# Altium PCB projet_pcb_bluepill_f103.PCBDOC
Units mil, origin at the board's own origin, x right, y up, seen from the top; angles counter-clockwise.
Board outline 3545 x 2760 mil, 2 copper layers (TopLayer, BottomLayer); 18 components, 39 nets, 100 pads, 7 vias.
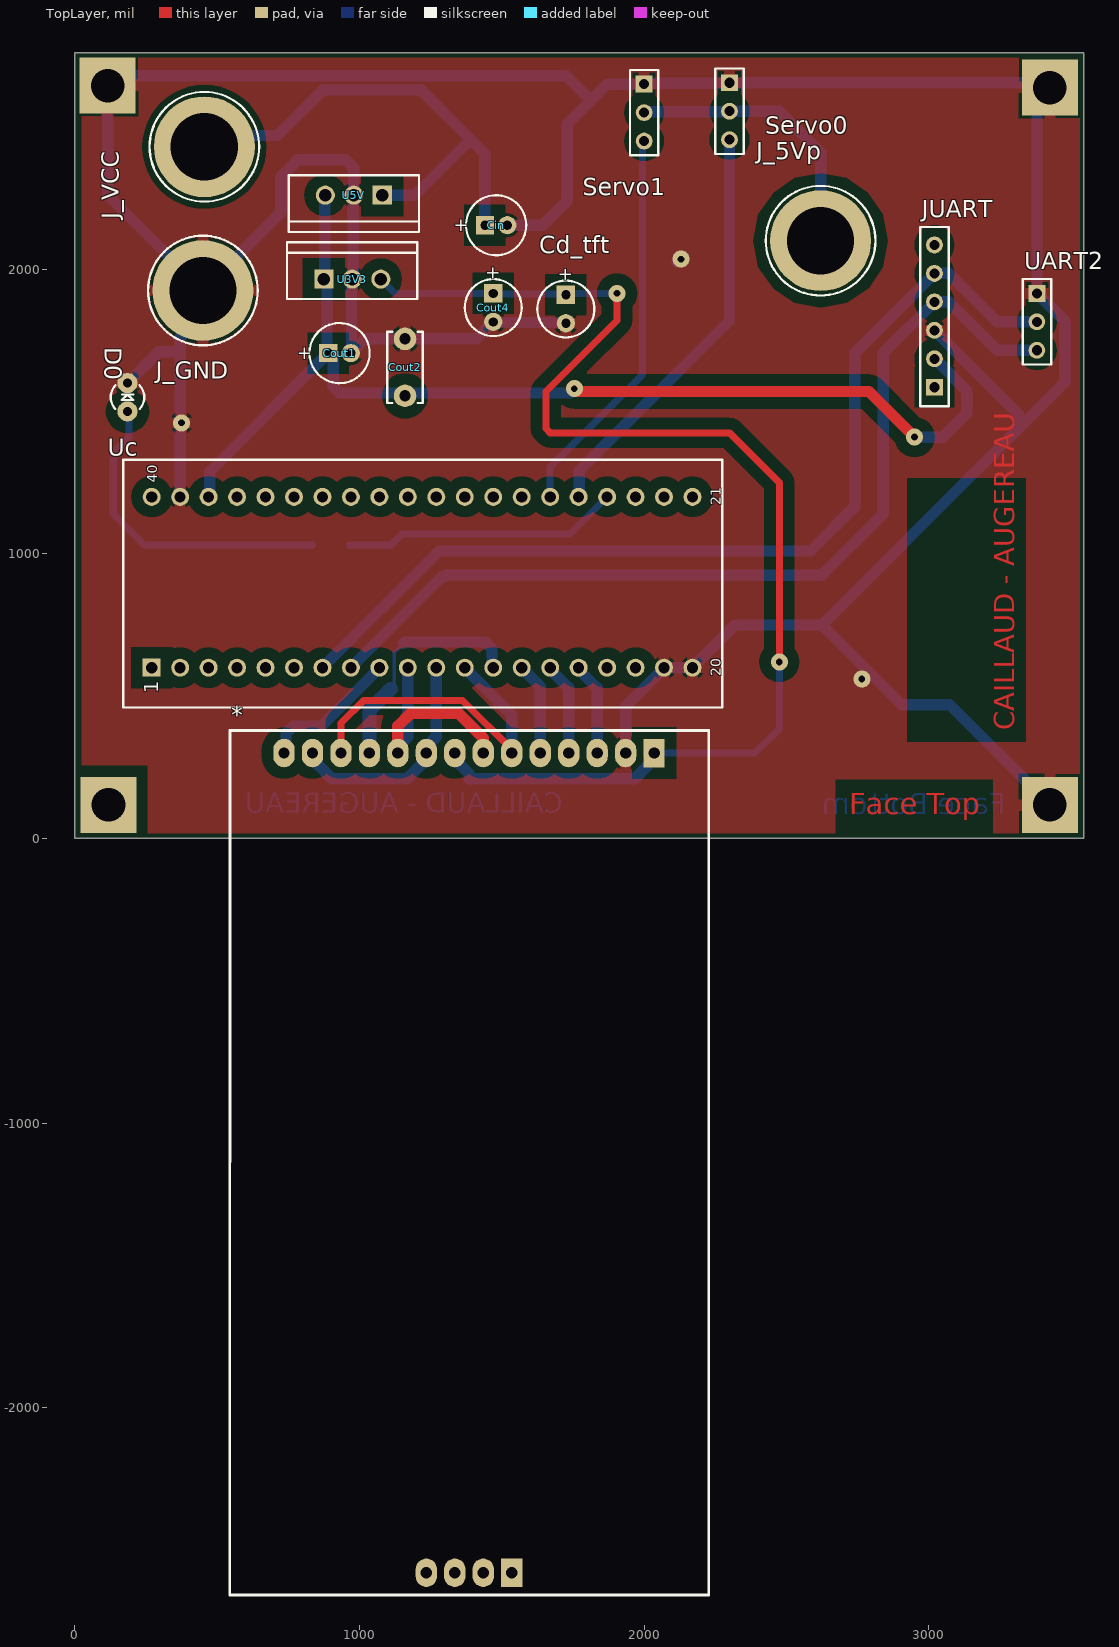
[diagram p0: TopLayer view]
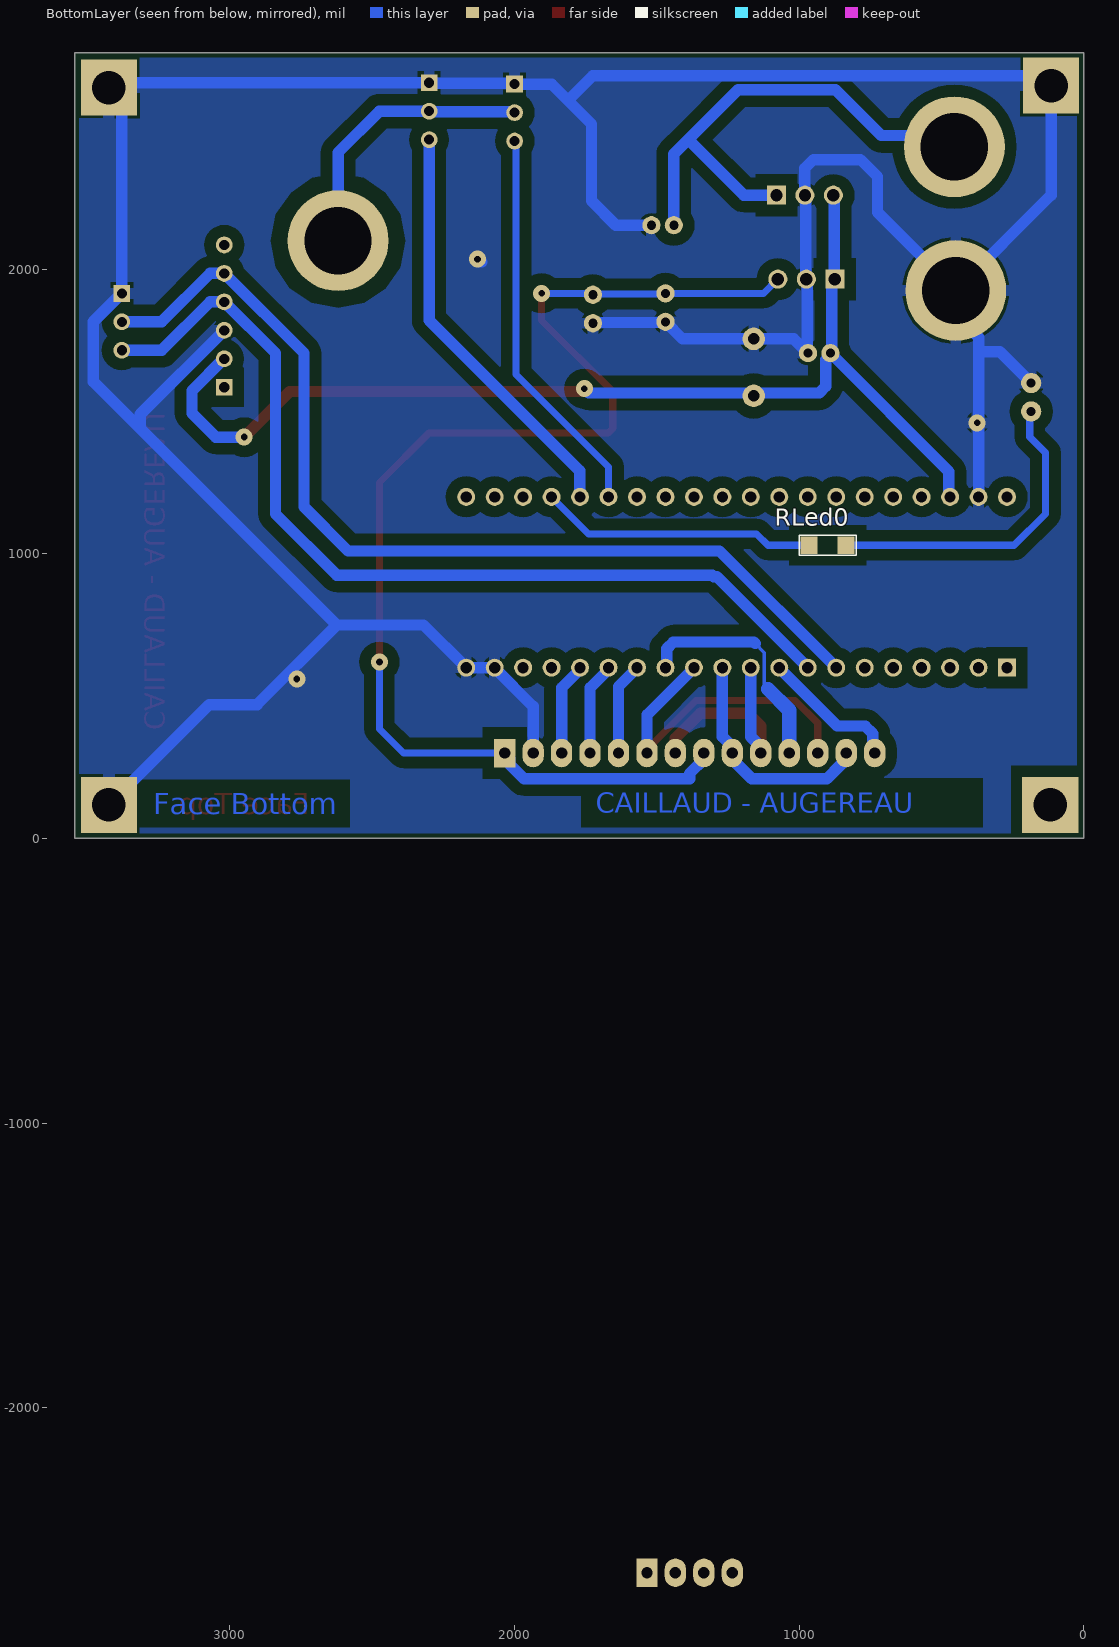
[diagram p1: BottomLayer view, seen from below]

## Layer stack, top to bottom
TopSolder: solder mask 0.4, Solder Resist, Dk 3.5
TopLayer: signal copper 1.4
Dielectric1: core 12.6, FR-4, Dk 4.8
BottomLayer: signal copper 1.4
BottomSolder: solder mask 0.4, Solder Resist, Dk 3.5

## Board outline
0,0 0,2760 3545,2760 3545,0

## Design rules (kind name [scope] priority, off if disabled: settings)
Clearance PowerPlaneClearance [InNamedPolygon('Bot-GND') Or  InNamedPolygon('Top-GND')] p1: gap=40 ignorepadtopadclearanceinfootprint=FALSE except(0: Arc-Hole Track-Hole SMDPad-Hole THPad-Hole Via-Hole Fill-Hole Poly-Hole Region-Hole Text-Hole)
Clearance [All] p2: gap=10 ignorepadtopadclearanceinfootprint=TRUE
FabricationTestPointUsage TestPointUsage [All] p1: valid=0 allowmultiple=FALSE
FabricationTestpoint Testpoint [All] p1: side=3 testpointundercomponent=TRUE minsize=40 maxsize=100 preferedsize=60 minholesize=20 maxholesize=40 preferedholesize=32 testpointgrid=1 allowsidetop=TRUE allowsidebottom=TRUE usegrid=TRUE gridtolerance=0.01
Height [All] p1: minheight=0 maxheight=2000 prefheight=500
HoleSize [All] p1: absolutevalues=TRUE maxlimit=300 minlimit=11.81 maxpercent=80.000 minpercent=20.000
PlaneClearance [All] p1: clearance=40
PlaneConnect [All] p1: planeconnectstyle=Relief reliefexpansion=19.68 reliefentries=4 reliefconductorwidth=40 reliefairgap=19.68
PolygonConnect [All] p1: connectstyle=Relief reliefconductorwidth=40 reliefentries=4 polygonreliefangle="90 Angle" airgapwidth=10
RoutingVias [All] p1: holewidth=23.62 width=60 viastyle="Through Hole" minholewidth=23.62 minwidth=60 maxholewidth=23.62 maxwidth=60
SilkToSolderMaskClearance SilkscreenOverComponentPads [IsPad] p1: minsilkscreentomaskgap=10 clearancetoexposedcopper=TRUE
SolderMaskExpansion [All] p1: expansion=2
Width [All] p1: maxlimit=1000 minlimit=12 preferedwidth=40 minimp=50.000000 maximp=50.000000 favimp=50.000000
23 further rules are at their usual default settings.

## Components (designator, comment, footprint, x,y, rotation, side; value= is the part's Value field where it differs from the comment)
* "2.4_TFT_TOUCH" 2.4_TFT_TOUCH 545,380 r270 top
Cd_tft "10uF" CONDENSATEUR_POLARISE_ELECTROLYTIQUE_RADIAL_2.54/5.08 1725,1910 r270 top
Cin "CONDENSATEUR_POL_ELECTROLY_RAD_2.0/5.08" CONDENSATEUR_POLARISE_ELECTROLYTIQUE_RADIAL_2.0/5.08 1480,2154.42 r0 top value=10µF/>25V
Cout1 "CONDENSATEUR_POL_ELECTROLY_RAD_2.0/5.08" CONDENSATEUR_POLARISE_ELECTROLYTIQUE_RADIAL_2.0/5.08 930,1705 r0 top value=1µF/>10V
Cout2 "CONDENSATEUR_CER_RAD_5.08" CONDENSATEUR_CERAMIQUE_RADIAL_5.08 1160,1755 r270 top value=100nF
Cout4 "CONDENSATEUR_POL_ELECTROLY_RAD_2.54/5.08" CONDENSATEUR_POLARISE_ELECTROLYTIQUE_RADIAL_2.54/5.08 1470,1915 r270 top value=4.7µF/63V
D0 "LED_3MM" LED_3MM 185,1550 r0 top
J_5Vp "DOUILLE BANANE 4mm" DOUILLE_BANANE_4mm#1 2620,2100 r0 top
J_GND "DOUILLE BANANE 4mm" DOUILLE_BANANE_4mm#2 450,1925 r0 top
J_VCC "DOUILLE BANANE 4mm" DOUILLE_BANANE_4mm#2 455,2430 r0 top
JUART "BARRETTE_6 CONTACTS_1 RANGEE_FEMELLE_DROITE" BARRETTE_6_F_D 3020,1585 r90 top
RLed0 "RESISTANCE_CMS_1206" RESISTANCE_CMS_1206 835,1030 r0 bottom value=150
Servo0 "BARRETTE 3 CONTACTS 1 RANGEE MALE DROITE" BARRETTE_3_M_D 2300,2655 r270 top
Servo1 "BARRETTE 3 CONTACTS 1 RANGEE MALE DROITE" BARRETTE_3_M_D 2000,2650 r270 top
U3V3 "REGULATEUR_TO220_78XX" REGULATEUR_TO220_78XX 975,1965 r0 top
U5V "REGULATEUR_TO220_78XX" REGULATEUR_TO220_78XX 980,2260 r180 top
UART2 "BARRETTE3" HDR1X3 3380,1915 r270 top
Uc "STM32F103C8T6/PCB_DIP40" STM32F103C8T6_DIP40 270,600 r90 top

## Footprints (in the part's own frame and the unit in brackets; to place one, negate y for a bottom-side part, rotate by r counter-clockwise, add the part's x,y. Pads: shape width x height; smd on the part's side, far side on the other; paste and mask are expansions set on the pad)
2.4_TFT_TOUCH [mil]
  rect 100x75 hole 40: 1(80,1490) 18(2959.84,990)
  oval 100x75 hole 40: 2(80,1390) 3(80,1290) 4(80,1190) 5(80,1090) 6(80,990) 7(80,890) 8(80,790) 9(80,690) 10(80,590) 11(80,490) 12(80,390) 13(80,290) 14(80,190) 15(2959.84,690) 16(2959.84,790) 17(2959.84,890)
  silkscreen extent 0,-1 3039,1682, body extent 0,-1 3039,1681, height 650
BARRETTE_3_M_D [mm] "BARRETTE 3 CONTACTS ; 1 RANGEE ; DROITE ; MALE ; ESPACEMENT BROCHES = 2.54 mm"
  rect 1.5x1.5 hole 0.9: 1(0,0)
  round 1.5 hole 0.9: 2(2.54,0) 3(5.08,0)
  silkscreen extent -1.27,-1.27 6.35,1.27, body extent -1.21,-1.42 6.41,1.5, height 8.61
BARRETTE_6_F_D [mm] "BARRETTE 6 CONTACTS ; 1 RANGEE ; DROITE ; FEMELLE ; ESPACEMENT BROCHES = 2.54 mm"
  rect 1.5x1.5 hole 0.9: 1(0,0)
  round 1.5 hole 0.9: 2(2.54,0) 3(5.08,0) 4(7.62,0) 5(10.16,0) 6(12.7,0)
  silkscreen extent -1.7,-1.27 14.3,1.27, body extent -1.57,-1.2 14.17,1.21, height 8.5
CONDENSATEUR_CERAMIQUE_RADIAL_5.08 [mil] "CONDENSATEUR TRAVERSANT CERAMIQUE RADIAL ; DIMENSIONS : 3.17mm x 5.08mm"
  round 79 hole 40: 1(0,0) 2(200,0)
  silkscreen extent -25,-63 225,63, body extent -11,-43 209,42, height 148
CONDENSATEUR_POLARISE_ELECTROLYTIQUE_RADIAL_2.0/5.08 [mil] "CONDENSATEUR POLARISE ELECTROLYTIQUE RADIAL ; DIAMETRE : 5.08mm ; ESPACEMENT BROCHES : 2mm"
  rect 64x64 / inner round 64 / far side round 64 hole 32: 1(-39.37,0)
  round 64 hole 32: 2(39.37,0)
  silkscreen extent -105,-106 106,106, body extent -98,-98 98,98, height 433
CONDENSATEUR_POLARISE_ELECTROLYTIQUE_RADIAL_2.54/5.08 [mil] "CONDENSATEUR_POLARISE_ELECTROLYTIQUE_RADIAL ; DIAMETRE : 5.08mm ; ESPACEMENT BROCHES : 2.54mm"
  rect 64x64 / inner round 64 / far side round 64 hole 32: 1(0,0)
  round 64 hole 32: 2(100,0)
  silkscreen extent -50,-100 150,100, body extent -50,-101 149,98, height 446
DOUILLE_BANANE_4mm#1 [mm] "DOUILLE BANANE ; DIAMETRE PASSAGE CONTACT = 4 mm ; DIAMETRE PERCAGE = 6 mm"
  round 9 hole 6: 1(0,0)
  TopLayer pour cut-out: -5.55,2.35 -4.2,4.3 -2.3,5.6 0,6 2.3,5.6 4.2,4.3 5.55,2.35 6,0 5.55,-2.35 4.3,-4.25 2.35,-5.55 0,-6 -2.35,-5.55 -4.2,-4.3 -5.55,-2.35 -6,0
  BottomLayer pour cut-out: -5.55,2.35 -4.2,4.3 -2.3,5.6 0,6 2.3,5.6 4.2,4.3 5.55,2.35 6,0 5.55,-2.35 4.3,-4.25 2.35,-5.55 0,-6 -2.35,-5.55 -4.2,-4.3 -5.55,-2.35 -6,0
  silkscreen extent -4.89,-4.89 4.89,4.89, body extent -5.5,-5.6 5.63,5.53, height 4.79
DOUILLE_BANANE_4mm#2 [mm] "DOUILLE BANANE ; DIAMETRE PASSAGE CONTACT = 4 mm ; DIAMETRE PERCAGE = 6 mm"
  round 9 hole 6: 1(0,0)
  silkscreen extent -4.89,-4.89 4.89,4.89, body extent -5.5,-5.6 5.63,5.53, height 4.79
HDR1X3 [mm] "Connector; Header; 3 Position"
  rect 1.5x1.5 hole 0.9: 1(0,0)
  round 1.5 hole 0.9: 2(2.54,0) 3(5.08,0)
  silkscreen extent -1.27,-1.27 6.35,1.27
LED_3MM [mm] "LED 3mm; 2 Leads"
  round 1.8 hole 0.8: 1(0,-1.27) 2(0,1.27)
  silkscreen extent -1.5,-1.06 1.5,1.06, body extent -1.64,-1.65 1.65,1.65, height 5.51
REGULATEUR_TO220_78XX [mm] "BOITIER TO220 ; DIMENSIONS : 11.2mm x 4.7mm ; ESPACEMENT BROCHES : 2.54 mm"
  rect 1.7x1.7 hole 1.1: 1(-2.54,0)
  round 1.7 hole 1.1: 2(0,0) 3(2.54,0)
  silkscreen extent -5.83,-1.77 5.8,3.29, body extent -5.61,-1.59 5.61,3.1, height 19.33
RESISTANCE_CMS_1206 [mil] "RESISTANCE CMS 1206 ; DIMENSIONS : 3.2mm x 1.6mm"
  rect 60x60 smd: 1(0,0) 2(130,0)
  silkscreen extent -35,-35 165,35, body extent 0,-31 126,31, height 39
STM32F103C8T6_DIP40 [mm] "STM32F103 monté sur DIP40"
  rect 1.6x1.6 hole 1: 1(0,0)
  round 1.6 hole 1: 2(0,-2.54) 3(0,-5.08) 4(0,-7.62) 5(0,-10.16) 6(0,-12.7) 7(0,-15.24) 8(0,-17.78) 9(0,-20.32) 10(0,-22.86) 11(0,-25.4) 12(0,-27.94) 13(0,-30.48) 14(0,-33.02) 15(0,-35.56) 16(0,-38.1) 17(0,-40.64) 18(0,-43.18) 19(0,-45.72) 20(0,-48.26) 21(15.24,-48.26) 22(15.24,-45.72) 23(15.24,-43.18) 24(15.24,-40.64) 25(15.24,-38.1) 26(15.24,-35.56) 27(15.24,-33.02) 28(15.24,-30.48) 29(15.24,-27.94) 30(15.24,-25.4) 31(15.24,-22.86) 32(15.24,-20.32) 33(15.24,-17.78) 34(15.24,-15.24) 35(15.24,-12.7) 36(15.24,-10.16) 37(15.24,-7.62) 38(15.24,-5.08) 39(15.24,-2.54) 40(15.24,0)
  silkscreen extent -3.56,-50.92 18.54,2.54, body extent -3.63,-51.04 18.37,6.1, height 20.63

## Part data
Cd_tft: library part Condensateur, "Capacitor", LatestRevisionDate=17-Jul-2002, LatestRevisionNote="Re-released for DXP Platform.", PackageReference=RAD-0.3, Published=8-Jun-2000, Publisher="Altium Limited"
Cin Cout1: "CONDENSATEUR POLARISE ELECTROLYTIQUE RADIAL 2.0/5.08", Type=POL_RAD_2.0/5.08
Cout2: "CONDENSATEUR TRAVERSANT CERAMIQUE RADIAL 5.08mm", Type=RADIAL_5.08
Cout4: "CONDENSATEUR POLARISE ELECTROLYTIQUE RADIAL 2.54/5.08", Type=POL_RAD_2.54/5.08
D0: "LED 3MM - ROUGE/VERTE/JAUNE", Type=LED_3mm
J_5Vp J_GND J_VCC: library part DOUILLE_BANANE_4mm, "DOUILLE BANANE 4 mm", Type=BANANE_4mm
JUART: "BARRETTE 6 CONTACTS 1 RANGEE FEMELLE DROITE", Type=F_D_6
RLed0: "RESISTANCE CMS 1206", Type=CMS_1206
Servo0 Servo1: library part "BARRETTE_3 CONTACTS_1 RANGEE_MALE_DROITE", Type=M_D_3
U3V3 U5V: "REGULATEUR DE TENSION POSITIVE 78XX BOITIER TO220", Package=(TO220)
  U3V3: Type=LF33CV
  U5V: Type=7805
UART2: "Header, 3-Pin", LatestRevisionDate=17-Jul-2002, LatestRevisionNote="Re-released for DXP Platform.", Publisher="Altium Limited"
Uc: "MICROCONTROLEUR 32 BITS - 72MHz - 34 I/O - 64 KO : FLASH - 20KO RAM - 10 CANAUX A/D 12 BITS - DIP40 - UART, SPI, I2C, USB, CAN", Package=DIP40, Type=STM32F103C8T6

## Free pads (board coordinates)
  rect 196.85x196.85 hole 118.11: 1(115,2645) 2(118.11,118.11) 3(3425.2,118.11) 4(3425.2,2637.8)

## Via types
v1: diameter 60, hole 23.62, TopLayer to BottomLayer, 7 vias

## Nets (pads, with @x,y where several pads share a name; then routed paths per layer and width w, separated by ;. In a path a pad name is that pad's centre, name@x,y a point inside that pad or via, vN(x,y) a via of type N, cw(c..) or ccw(c..) an arc to the next point about the centre after c; other vN are vias at no path point)
+3V3: *.1 *.8 Cd_tft.1 Cout4.1 U3V3.3 | length 4483.5
  TopLayer w25: v1(1905,1915) 1905,1820 1655,1570 1655,1439.64 1669.64,1425 2300,1425 2475,1250 v1(2475,620)
  BottomLayer w25: U3V3.3 1075.36,1965 1125.36,1915 Cout4.1 1472.5,1912.5 1722.5,1912.5 Cd_tft.1 1730,1915 v1(1905,1915) ; *.1 2390,300 2475,385 v1(2475,620)
  BottomLayer w40: *.8 1335,278.03 1385,228.03 1385,210 1967.1,210 2017.5,260.4 2017.5,282.5 *.1
+3V3_BP: Uc.40
+3V3_BP2: Uc.18
+5V: Cout1.1 Cout2.2 JUART.2 U3V3.1 U5V.3 Uc.38 | length 3956.7
  TopLayer w40: v1(1755,1580) 1765,1570 2790,1570 v1(2950,1410)
  BottomLayer w40: Uc.38 474.4,1204.4 474.4,1288.77 Cout1.1 ; U5V.3@882.5,2262.5 U5V.3 877.5,2257.5 877.5,1967.5 U3V3.1 886.04,1953.96 886.04,1709.59 Cout1.1 ; v1(1755,1580) 1740,1565 930,1565 907.37,1587.63 907.37,1681.77 890.63,1698.51 Cout1.1 ; v1(2950,1410) 3050,1410 3133.43,1493.43 3133.43,1573.05 3021.48,1685 JUART.2
+5V_Puissance: J_5Vp.1 Servo0.2 Servo1.2 | length 1071.8
  TopLayer w40: J_5Vp.1@2580.3,2059.78 J_5Vp.1@2636.66,2116.13
  BottomLayer w40: Servo1.2 2002.5,2552.5 2297.5,2552.5 Servo0.2 2475,2555 2620,2410 J_5Vp.1
GND: *.2 Cd_tft.2 Cin.2 Cout1.2 Cout2.1 Cout4.2 D0.2 J_GND.1 JUART.3 pad.1 pad.3 pad.4 Servo0.1 Servo1.1 U3V3.2 U5V.2 UART2.1 Uc.19 Uc.20 Uc.39 | length 12968.1
  TopLayer w40: v1(375,1460) v1@380,1455
  BottomLayer w39.37: UART2.1 3380,2592.6 pad.4
  BottomLayer w40: D0.2 295,1710 370,1710 ; Uc.39 370,1710 ; Cout1.2 Cout1.2@972.19,1707.81 ; Cin.2 1644.42,2154.42 1730,2240 1730,2510 1812.5,2592.5 ; Cd_tft.2 1722.5,1812.5 1472.5,1812.5 Cout4.2 1410,1755 Cout2.1 1019.37,1755 Cout1.2@972.19,1707.81 ; *.2 1935,463.89 2070,598.89 Uc.19 Uc.20 2320,750 2625,750 ; v1@2115,2025 2120,2025 v1(2130,2035) ; Servo0.1@2295,2650 Servo0.1@2297.5,2652.5 ; JUART.3 3315,1490 3315,1440 ; UART2.1 3480,1815 3480,1605 3315,1440 ; pad.3 3072.99,470.31 2904.69,470.31 2625,750 ; pad.4 3407.99,2655 Servo0.1 Servo0.1@2297.5,2652.5 ; 370,1710 370,1759.94 450,1839.94 J_GND.1 ; J_GND.1 725,2200 725,2325 785,2385 950,2385 980,2355 U5V.2 977.5,2257.5 977.5,1967.5 U3V3.2 972.19,1962.19 Cout1.2@972.19,1707.81 ; J_GND.1 115,2260 pad.1 150,2680 1725,2680 1812.5,2592.5 ; 1812.5,2592.5 1870,2650 Servo1.1 2002.5,2652.5 Servo0.1@2297.5,2652.5 ; 2625,750 3315,1440
  other v1: 2765,560
NetD0_1: D0.1 RLed0.1 | length 1130.4
  BottomLayer w25: D0.1 190,1495 190,1410 135,1355 135,1140 245,1030 RLed0.1
PA0_AN0: Uc.5
PA1_AN1: Uc.6
PA2_U2TX: JUART.5 UART2.2 Uc.7 | length 3455.4
  BottomLayer w40: Uc.7 1280,1010 2585,1010 2740,1165 2740,1705 JUART.5 ; JUART.5@3035,1985 3070,1985 3240,1815 UART2.2
PA3_U2RX: JUART.4 UART2.3 Uc.8 | length 3343.7
  BottomLayer w40: Uc.8 1290,920 1300,920 1305,925 2625,925 2840,1140 2840,1705 JUART.4 3070,1885 3240,1715 UART2.3
PA4_TOUCH-IRQ: *.14 Uc.9 | length 496
  BottomLayer w40: *.14 741.7,306.7 741.7,368.27 768.43,395 866.11,395 1070,598.89 Uc.9
PA5_TFT-SCK: *.7 *.10 Uc.10 | length 816.8
  TopLayer w40: *.10 1135,395 1180,440 1347.4,440 1435,352.4 *.7
  BottomLayer w40: *.10 1135,321.97 1170,356.97 Uc.10
PA6_TFT-MISO: *.9 *.13 Uc.11 | length 814.9
  BottomLayer w40: *.13 835,278.03 857.5,255.53 857.5,255.4 902.9,210 1167.1,210 1228.3,271.2 1228.3,293.3 *.9 1235,321.97 1270,356.97 Uc.11
PA7_TFT-MOSI: *.6 *.12 Uc.12 | length 1190.4
  TopLayer w25: *.12 935,405 1015,485 1362.5,485 1535,312.5 *.6
  BottomLayer w40: Uc.12 1370,598.89 1535,433.89 *.6
PA8: Servo0.3 Uc.25 | length 1474.5
  BottomLayer w40: Uc.25 1771.5,1201.5 1771.5,1291.5 2300,1820 Servo0.3
PA9: Servo1.3 Uc.26 | length 1386.7
  BottomLayer w25: Uc.26 1670,1305 1995,1630 1995,2445 Servo1.3
PA10: Uc.27
PA11: Uc.28
PA12: Uc.29
PA15: Uc.30
PB0_TOUCH-CS: *.11 Uc.13 | length 825.5
  BottomLayer w12: 1110,525 1122.5,537.5 1122.5,652.5 1155,685
  BottomLayer w40: 1155,685 1160,690 1442.17,690 1465.6,666.57 1465.6,604.4 Uc.13
  BottomLayer w50: *.11 1035,450 1110,525
PB1_TFT-DC: *.5 Uc.14 | length 326.9
  BottomLayer w40: Uc.14 1570,598.89 1635,533.89 *.5
PB3: Uc.31
PB4: Uc.32
PB5: Uc.33
PB6_U1TX: Uc.34
PB7_U1RX: Uc.35
PB8_I2C_SCL: Uc.36
PB9_I2C_SDA: Uc.37
PB10_TFT-RESET: *.4 Uc.15 | length 326.9
  BottomLayer w40: Uc.15 1670,593.78 1735,528.78 *.4
PB11_TFT-CS: *.3 Uc.16 | length 326.9
  BottomLayer w40: Uc.16 1770,593.78 1835,528.78 *.3
PB12: Uc.21
PB13: Uc.22
PB14: Uc.23
PB15: RLed0.2 Uc.24 | length 975.4
  BottomLayer w25: RLed0.2 1110,1030 1150,1070 1740,1070 Uc.24
PC14_OSC32: Uc.3
PC15_OSC32: Uc.4
VCC: Cin.1 J_VCC.1 U5V.1 | length 1782.6
  BottomLayer w40: J_VCC.1@475,2430 514.64,2469.64 712.17,2469.64 872.53,2630 1215,2630 1390,2455 ; U5V.1 1195,2260 1390,2455 ; Cin.1 1440.63,2404.37 1390,2455
pads on no net: *.15 *.16 *.17 *.18 JUART.1 JUART.6 Uc.1 Uc.2 Uc.17

## Polygon pours and split planes (outlines as drawn)
GND on BottomLayer "Bot-GND" (solid, pour order 5): 25,2742.5 3530,2742.5 3530,17.5 25,17.5
GND on TopLayer "Top-GND" (solid, pour order 4): 25,2742.5 3530,2742.5 3530,17.5 25,17.5

## Other copper
TopLayer:
  text "CAILLAUD - AUGEREAU" at 3300,380 h70.87 r90
  text "Face Top" at 2720,85 h75
BottomLayer:
  text "CAILLAUD - AUGEREAU" at 1715,90 h70.87
  text "Face Bottom" at 3270,85 h75

## Silkscreen, mask and mechanical layers (free items; w line width, h text height)
Mechanical1:
  the board outline again, w20

## Text inside footprints (layer, text, board x,y; h text height)
Cd_tft: TopOverlay "+" at 1703.35,2006.85 h45 r270
Cin: TopOverlay "+" at 1331.18,2132.77 h45
Cout1: TopOverlay "+" at 781.18,1683.35 h45
Cout4: TopOverlay "+" at 1448.35,2011.85 h45 r270
Uc: TopOverlay "21" at 2270,1170 h35.43 r90; TopOverlay "40" at 290,1250 h35.43 r90; TopOverlay "20" at 2270,570 h35.43 r90; TopOverlay "1" at 293.62,509.45 h50 r90